# Altium PCB PCB2.PcbDoc
Units mm, origin at the board's own origin, x right, y up, seen from the top; angles counter-clockwise.
Board outline 150 x 65 mm, 2 copper layers (Top Layer, Bottom Layer); 20 components, 26 nets, 104 pads, 0 vias.
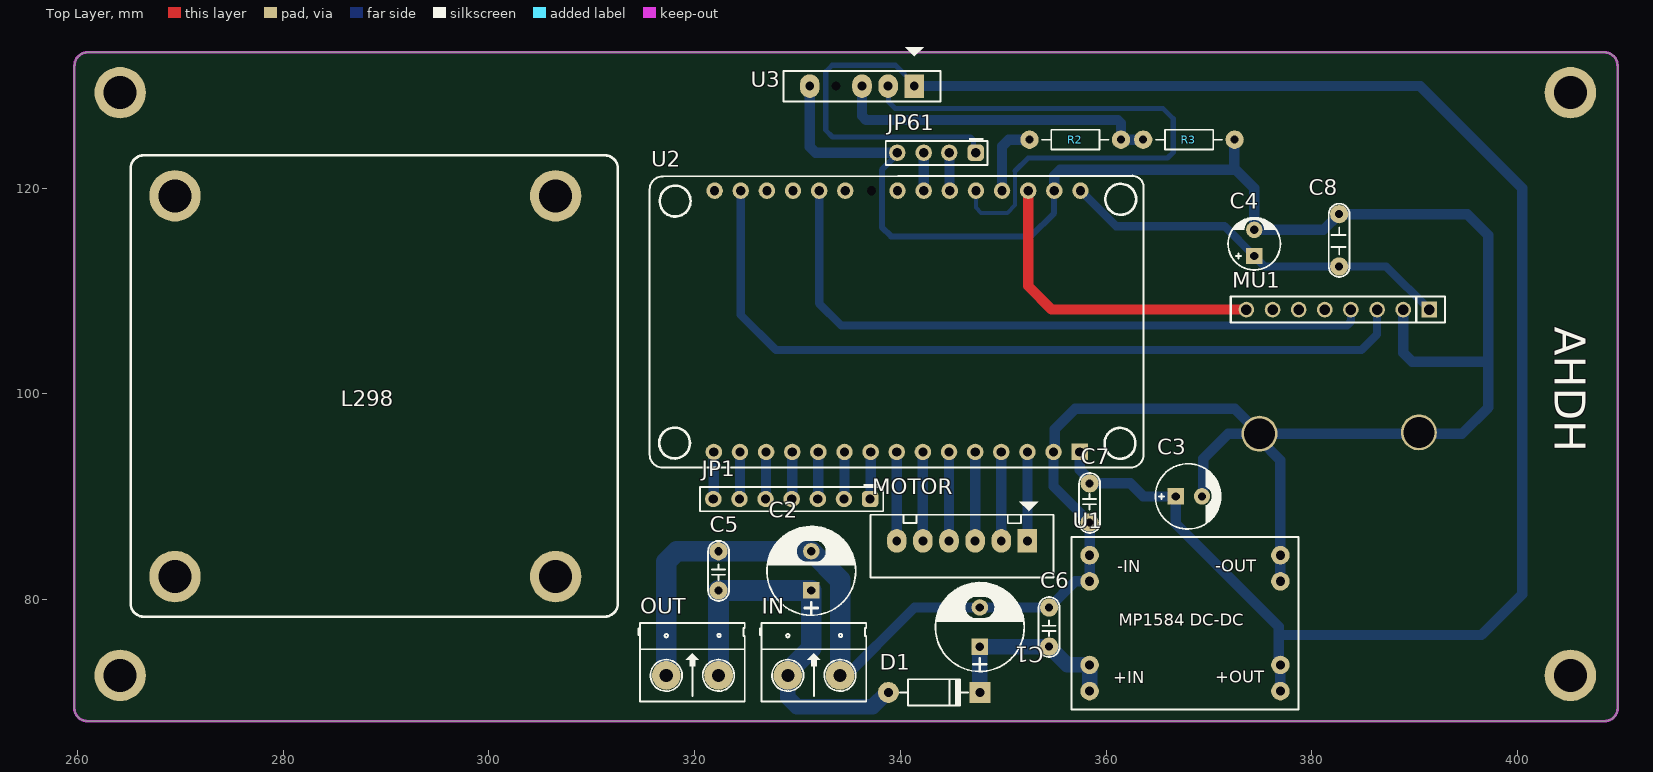
[diagram p0: Top Layer view]
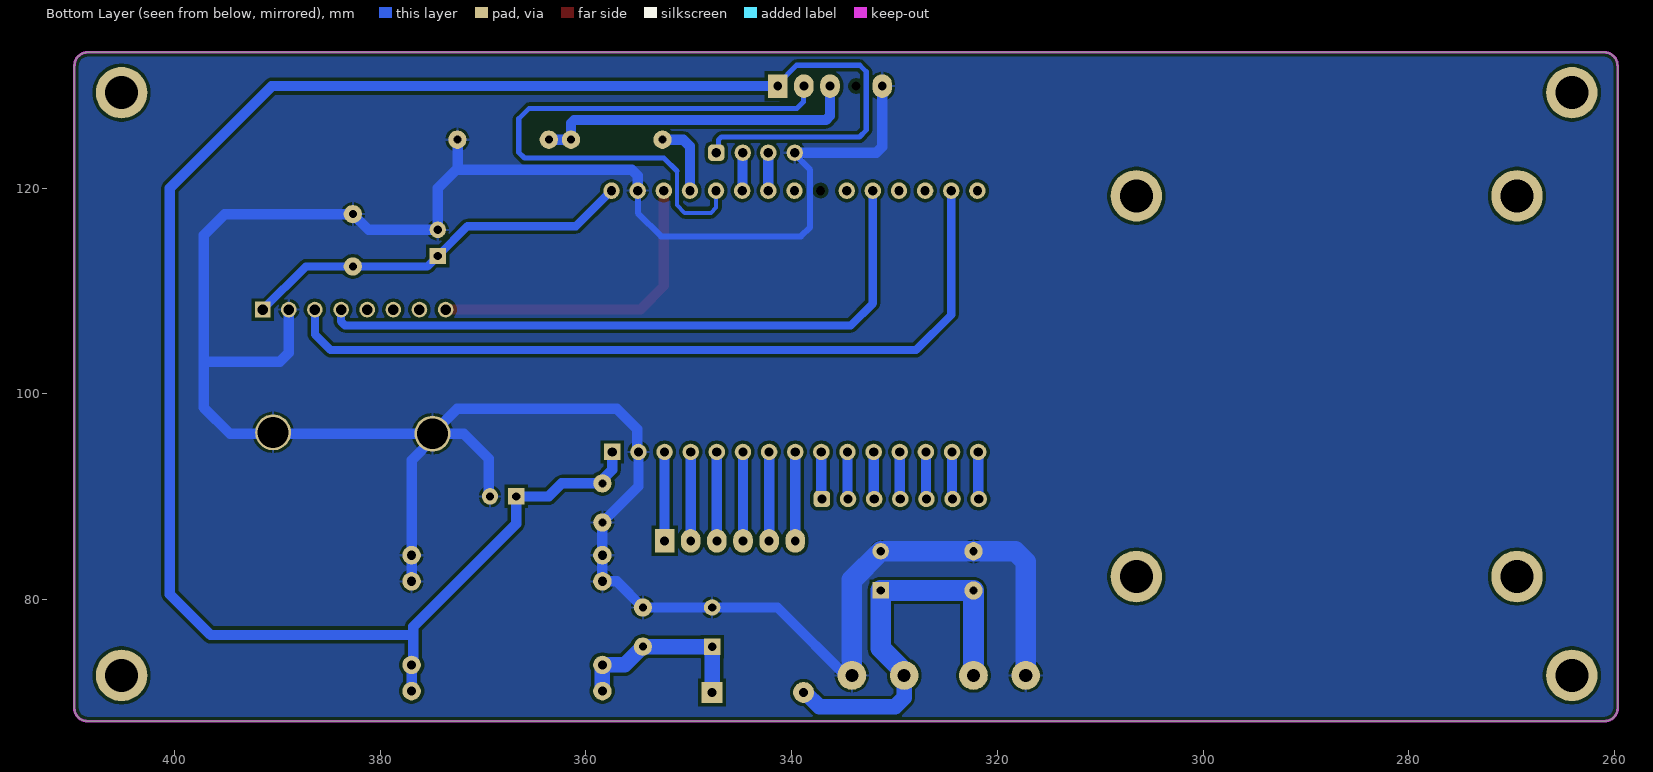
[diagram p1: Bottom Layer view, seen from below]
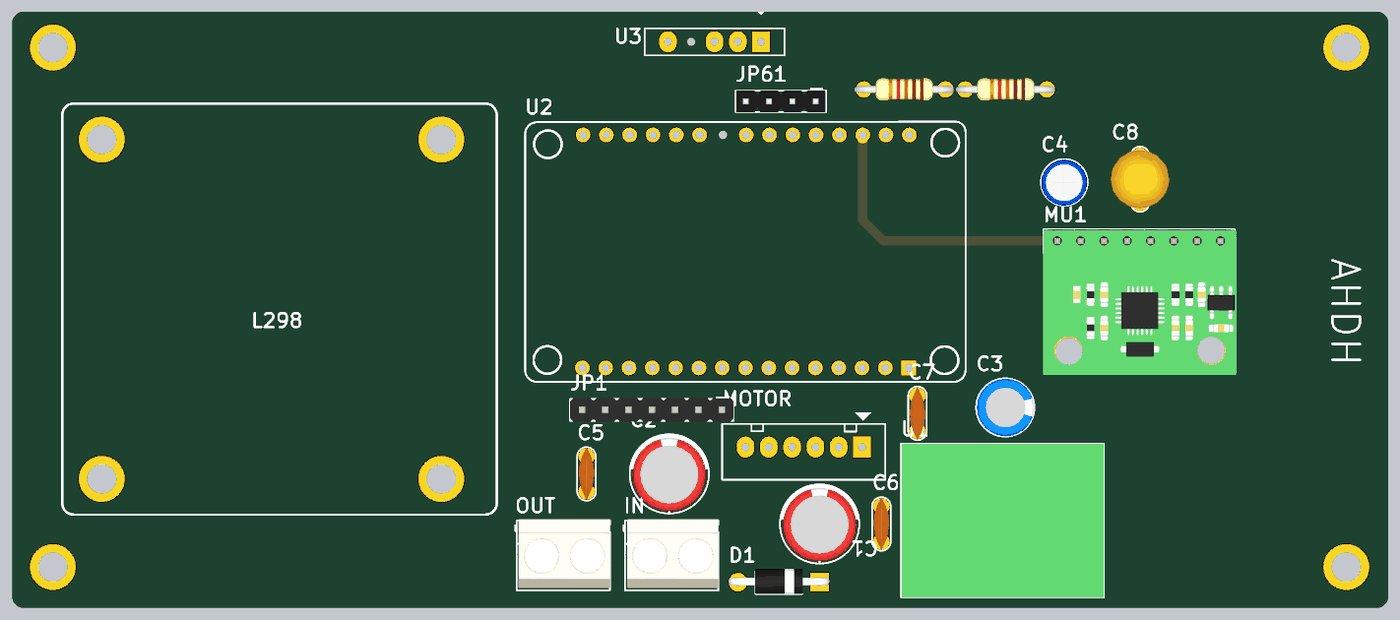
[diagram p2: 3D render of the assembled board from above, using the file's embedded part models]

## Layer stack, top to bottom
Top Solder: solder mask 0.0102, Solder Resist, Dk 3.5
Top Layer: signal copper 0.0356
Dielectric 1: dielectric 0.32, FR-4, Dk 4.8
Bottom Layer: signal copper 0.0356
Bottom Solder: solder mask 0.0102, Solder Resist, Dk 3.5

## Board outline
259.715,69.469 ccw(c260.985,69.469) 260.985,68.199 408.445,68.199 ccw(c408.445,69.469) 409.715,69.469 409.715,131.924 ccw(c408.438,131.924) 408.438,133.201 260.991,133.199 ccw(c260.991,131.932) 259.724,131.932 259.715,131.923

## Design rules (kind name [scope] priority, off if disabled: settings)
Clearance [All] p1: gap=0.25 ignorepadtopadclearanceinfootprint=FALSE
PolygonConnect [All] p1: connectstyle=Relief reliefconductorwidth=0.254 reliefentries=4 polygonreliefangle="90 Angle" airgapwidth=0.254
RoomDefinition Sheet2 [InComponentClass('Sheet2')] p1: confinementstyle=ConfineIn formatcopy=TRUE lockcomponents=FALSE outline 0,0 50.8,0 50.8,25.4 0,25.4
RoutingVias [All] p1: holewidth=0.711 width=1.27 viastyle="Through Hole" minholewidth=0.711 minwidth=1.27 maxholewidth=0.711 maxwidth=1.27
SolderMaskExpansion [All] p1: expansion=0.102 istentingtop=FALSE
Width [InNetClass('Signal')] p1: maxlimit=1 minlimit=0.4 preferedwidth=0.8
Width GND [InNet('GND')] p2: maxlimit=3 minlimit=0.5 preferedwidth=1
Width 3V [InNet('+3V')] p3: maxlimit=1.2 minlimit=0.5 preferedwidth=0.8
Width 5V [InNet('+5V')] p4: maxlimit=1.5 minlimit=0.5 preferedwidth=1
Width 12V [InNet('+12V')] p5: maxlimit=3 minlimit=1 preferedwidth=1.5
Width +V [InNet('+V')] p6: maxlimit=2 minlimit=1 preferedwidth=1.5
30 further rules are at their usual default settings.

## Components (designator, comment, footprint, x,y, rotation, side; value= is the part's Value field where it differs from the comment)
C1 "470uF/16V" CP1.5/3.4 347.726,75.438 r90 top value=100uF/35V/50V
C2 "1000uF/16V" CP1.5/3.4 331.343,80.899 r90 top
C3 "220uF" CP1/2.5 366.776,90.043 r0 top value="47uF/16 - 50V"
C4 "100uF" CP1/2 374.396,113.411 r90 top value=10uF/50V
C5 "104" CN1.5 322.326,82.677 r90 top value=0.1uF
C6 "104" CN1.5 354.457,77.216 r90 top value=0.1uF
C7 "104" CN1.5 358.394,89.535 r270 top value=0.1uF
C8 "104" CN2 382.651,112.395 r90 top value=0.1uF
D1 "Diode" D1A 338.836,70.993 r180 top value=1N5007
IN "Header 2" KF301-2P 329.057,72.644 r0 top
JP1 "JP7 PIN" JP7 337.058,89.789 r180 top value=JP7
JP61 "Jumper 4" JP4 344.78,123.444 r180 top value=J3
MOTOR "JP6 PIN" CON6 352.349,85.725 r180 top value=JP7
MU1 "MPU6050" MPU6050 385.826,100.711 r180 top
OUT "Header 2" KF301-2P 317.246,72.644 r0 top
R2 "1k" R1/4W 352.552,124.714 r0 top value="R1/4W - 1K"
R3 "2k" R1/4W 363.601,124.714 r0 top value="R1/4W - 1K"
U1 "Module MP1584 DC-DC" "MP1584 DC-DC" 358.394,84.328 r0 top
U2 "ESP32-BOARD30" ESP32-BOARD30-900 357.429,94.361 r90 top
U3 "HY-SRF05" SRF05 341.352,129.923 r180 top

## Footprints (in the part's own frame and the unit in brackets; to place one, negate y for a bottom-side part, rotate by r counter-clockwise, add the part's x,y. Pads: shape width x height; smd on the part's side, far side on the other; paste and mask are expansions set on the pad)
CN1.5 [mil]
  round 70 hole 31: 1(-70,0) 2(80,0)
  silkscreen extent -110,-40 120,40, body extent -110,-33 120,33, height 235
CN2 [mil]
  round 70 hole 31: 1(0,0) 2(200,0)
  silkscreen extent -40,-40 240,40, body extent -26,-125 226,126, height 423
CON6 [mil] "CON6"
  rect 75x90 hole 34: 1(0,0)
  oval 75x90 hole 34: 2(100,0) 3(200,0) 4(300,0) 5(400,0) 6(500,0)
  silkscreen extent -100,-150 600,140
CP1.5/3.4 [mm] "Tu hoa 220->470uF,16V, 470uF/16V,25V"
  rect 1.6x1.6 hole 0.8: 1(0,0)
  round 1.6 hole 0.8: 2(3.81,0)
  silkscreen extent -2.41,-4.32 6.22,4.32, body extent -2.16,-4 5.84,4, height 11.33
CP1/2 [mm] "Tu hoa < 22uF/16>50V"
  rect 1.6x1.6 hole 0.8: 1(0,0)
  round 1.6 hole 0.8: 2(2.54,0)
  silkscreen extent -1.35,-2.54 3.72,2.54, body extent -1.38,-2.51 3.67,2.54, height 7.53
CP1/2.5 [mm] "Tu hoa 33 >100 uF,50V, 220uF/16V,25V"
  rect 1.6x1.6 hole 0.8: 1(0,0)
  round 1.6 hole 0.8: 2(2.54,0)
  silkscreen extent -1.99,-3.17 4.36,3.17, body extent -1.93,-3.15 4.37,3.15, height 10.71
D1A [mil] "Diode 1A, W 100mil, L 350mil"
  round 80 hole 35: 1(0,0)
  rect 80x80 hole 35: 2(-350,0)
  silkscreen extent -305,-50 -45,50, body extent -393,-57 41,51, height 107
ESP32-BOARD30-900 [mm] "Footprint for ESP-32S-BOARD30-PIN, W=900mil"
  rect 1.6x1.6 hole 0.9: 1(0,0)
  round 1.6 hole 0.9: 2(0,2.54) 3(0,5.08) 4(0,7.62) 5(0,10.16) 6(0,12.7) 7(0,15.24) 8(0,17.78) 9(0,20.32) 10(0,22.86) 11(0,25.4) 12(0,27.94) 13(0,30.48) 14(0,33.02) 15(0,35.56) 16(25.4,35.484) 17(25.4,32.944) 18(25.4,30.404) 19(25.4,27.864) 20(25.4,25.324) 21(25.4,22.784) 23(25.4,17.704) 24(25.4,15.164) 25(25.4,12.624) 26(25.4,10.084) 27(25.4,7.544) 28(25.4,5.004) 29(25.4,2.464) 30(25.4,-0.076)
  round 0 hole 0.9: 22(25.4,20.244)
  silkscreen extent -1.52,-6.2 26.85,41.8
JP4 [mm] "Header 2.54MM 4P"
  rrect50% 1.6x1.6 hole 0.9: 1(-2.54,0)
  round 1.6 hole 0.9: 2(0.025,0) 3(2.515,0) 4(5.08,0)
  silkscreen extent -3.68,-1.45 6.2,1.19, body extent -3.58,-1.14 6.17,1.19, height 8.13
JP7 [mm] "Header 2.54MM 7P"
  rrect50% 1.6x1.6 hole 0.9: 1(0,0)
  round 1.6 hole 0.9: 2(2.54,0) 3(5.08,0) 4(7.62,0) 5(10.16,0) 6(12.7,0) 7(15.24,0)
  silkscreen extent -1.27,-1.45 16.54,1.19, body extent -1.27,-1.27 16.51,1.27, height 8.45
KF301-2P [mil] "Header 2, 2 pin, hight 300mil, Pin to Pin 200, Colour Green"
  round 110 hole 50: 1(0,0) 2(200,0)
  silkscreen extent -106,-100 300,200, body extent -92,-90 302,205, height 394
"MP1584 DC-DC" [mm] "Module MP1584 DC-DC, Vin 4.5-28V"
  round 1.8 hole 0.9: 1(0,-2.54) 1(0,0) 2(0,-13.208) 2(0,-10.668) 3(18.542,-13.208) 3(18.542,-10.668) 4(18.542,-2.54) 4(18.542,0)
  silkscreen extent -1.78,-14.99 20.32,1.78, body extent -1.73,-15.02 20.27,1.78, height 3.6
MPU6050 [mm]
  rect 1.52x1.52 hole 1.02: 1(-5.588,-7.493)
  round 3.5 hole 3: 2(-4.572,4.445) 2(10.922,4.572)
  round 1.52 hole 1.02: 2(-3.048,-7.493) 3(-0.508,-7.493) 4(2.032,-7.493) 5(4.572,-7.493) 6(7.112,-7.493) 7(9.652,-7.493) 8(12.192,-7.493)
  silkscreen extent -7.11,-8.76 13.71,-6.22, body extent -7.37,-8.76 13.74,7.11, height 14.54
R1/4W [mil] "R 1/4W, 2 Pin, 350mil"
  round 70 hole 31: 1(0,0) 2(350,0)
  silkscreen extent 48,-38 302,38, body extent -40,-47 386,47, height 111
SRF05 [mil] "CON5"
  rect 75x90 hole 34: 1(0,0)
  oval 75x90 hole 34: 2(100,0) 3(200,0) 5(400,0)
  round 0 hole 34: 4(300,0)
  silkscreen extent -100,-150 500,59

## Part data
C1: library part CP3, "Cap 100uF/35V - 470uF/16V", Description 1="1000uF/6,3V - 470uF/16V - 330uF - 25V", Description 2="220uF/35V - 100uF/50V - 63V - 4,7uF/200V", Description 3="22uF => 33uF100V - 3,3uF => 4,7uF/250V", Description 4="2,2uF =>3,3uF/350 - 2,2uF/400V - 1uF/450V"
C2: library part CP4, "Cap 1000uF/16V - 220uF/50V", Description 1="2200uF-3300uF/6,3V - 1000uF-2200uF/10V", Description 2="1000uF/16V - 470uF => 1000uF/25V - 100uF/100V", Description 3=330uF>470uF/35V_220uF>470uF/50V_10uF>22uF/250V, Description 4="220uF => 330uF/63V - 10uF =>33uF/160 - 200V", Description 5="4,7uF>10uF/250V_3,3uF>10uF/400V - 2,2uF>4,7uF/450V"
C3: library part CP2, "C 47uF/50V , 220uF/16V", Description 1="470uF/6,3V - 330uF/10V - 220uF/16V", Description 2="100uF/25V - 35V - 47uF/50V - 22uF/100V", Description 3="33uF => 47uF/63V - 1uF => 4,7uF/160V", Description 4="1uF => 2,2uF/250V - 1uF/350V"
C4: library part CP1, "Cap P  0,1uF < 22uF , 16 - 50V", Description 1="10 => 220uF/6,3V/10V - 10uF => 100uF/16V", Description 2="0,1uF => 33uF/50V - 10uF => 22uF/63V", Description 3="0,47uF => 10uF/100V"
C5 C6 C7 C8: library part CN2, "Cap np 104 => 105pF"
D1: "Default Diode", Code - JEDEC=DO-214-AB, Published=8-Jun-2000, Publisher="Altium Limited", Revision="July-2002: Re-released for DXP Platform."
IN OUT: library part Hed2, "Header 2 (Green)"
JP1: library part JP7
JP61: library part JP4
MOTOR: library part ISP6, "ISP6 PIN"
MU1: Manufacturer="W¨¹rth Elektronik eiSos GmbH", partNo=613004143121, ComponentLink1 Description=Manufacturer, ComponentLink1URL=http://www.we-online.com, ComponentLink2 Description=Datasheet, ComponentLink2URL=http://katalog.we-online.de/em/datasheet/6130xx143121.pdf, Created by="Karrer Zheng", Created Date="29 March 2013", NoPins=04
R2 R3: library part R1/4W, "Resistor 1/4W"
U1: library part "MP1584 DC-DC"

## Free pads (board coordinates)
  round 5 hole 3.2: 1(264.16,72.644) 1(264.16,129.286) 1(269.494,82.253) 1(269.494,119.253) 1(306.494,82.253) 1(306.494,119.253) 1(405.13,72.644) 1(405.13,129.286)

## Nets (pads, with @x,y where several pads share a name; then routed paths per layer and width w, separated by ;. In a path a pad name is that pad's centre, name@x,y a point inside that pad or via, vN(x,y) a via of type N, cw(c..) or ccw(c..) an arc to the next point about the centre after c; other vN are vias at no path point)
+3V: C4.1 C8.1 MU1.1 U2.30 | length 38.7
  Bottom Layer w0.8: U2.30 360.959,116.307 371.5,116.307 C4.1 375.412,112.395 C8.1 387.223,112.395 MU1.1
+5V: C3.1 C7.1 JP61.1 U1.3 U2.1 U3.1 | length 195.1
  Bottom Layer w0.5: U3.1@341.352,130.113 339.513,131.953 333.375,131.953 332.74,131.318 332.74,125.642 333.414,124.968 346.831,124.968 347.124,124.675 347.124,123.639 JP61.1 ; C7.1 C7.1@358.394,91.659
  Bottom Layer w1: U3.1@341.352,130.113 U3.1 390.523,129.923 400.431,120.015 400.431,80.518 396.494,76.581 376.91,76.581 376.783,76.708 ; U2.1 357.429,92.624 C7.1@358.394,91.659 ; C7.1 362.331,91.313 363.601,90.043 C3.1 366.776,87.376 376.783,77.369 376.783,76.708 ; U1.3@376.936,71.12 376.936,73.66 376.783,73.813 376.783,76.708
+12V: C2.1 C5.1 D1.1 IN.1 OUT.2 | length 39.4
  Bottom Layer w1.5: IN.1@329.057,72.994 329.057,70.475 329.936,69.596 337.295,69.596 338.692,70.993 D1.1
  Bottom Layer w2: OUT.2 C5.1 C2.1 331.343,75.28 IN.1@329.057,72.994
+V: C1.1 C6.1 D1.2 U1.2 | length 18.4
  Bottom Layer w1.5: D1.2 C1.1 C6.1 356.235,73.66 358.394,73.66 U1.2@358.394,71.12
GND: C1.2 C2.2 C3.2 C4.2 C5.2 C6.2 C7.2 C8.2 IN.2 JP61.4 MU1.2 OUT.1 R3.2 U1.1 U1.4 U2.2 U2.29 U3.5 | length 278.9
  Top Layer w1: C3.2@369.316,89.993 C3.2
  Bottom Layer w0.5: U2.29@354.939,119.735 U2.29
  Bottom Layer w0.6: JP61.4@339.7,123.282 338.201,121.783 338.201,116.205 339.09,115.316 352.679,115.316 354.939,117.576 U2.29@354.939,119.735
  Bottom Layer w1: U3.5 331.192,124.03 331.778,123.444 JP61.4 JP61.4@339.7,123.282 ; IN.2@334.137,72.009 341.376,79.248 C1.2 C6.2 356.997,81.788 358.394,81.788 358.394,84.328 C7.2 354.889,91.008 U2.2 355.004,94.476 355.004,96.559 356.997,98.552 372.491,98.552 MU1.2@374.904,96.139 ; U2.29 354.965,121.207 355.551,121.793 372.286,121.793 ; C3.2 369.431,90.158 369.431,93.714 371.856,96.139 MU1.2@374.904,96.139 ; R3.2 372.452,124.675 372.452,121.959 374.396,120.015 C4.2 381.127,115.951 C8.2 395.097,117.475 397.129,115.443 397.129,103.124 ; U1.4@376.936,81.788 376.936,84.328 376.936,93.575 374.904,95.607 MU1.2@374.904,96.139 ; MU1.2@388.874,108.204 388.874,104.013 389.763,103.124 397.129,103.124 ; MU1.2@374.904,96.139 394.589,96.139 397.129,98.679 397.129,103.124
  Bottom Layer w2: OUT.1 317.246,83.693 318.262,84.709 C5.2 C2.2 334.137,81.915 IN.2
NetJP1_1: JP1.1 U2.9 | length 4.6
  Bottom Layer w1: JP1.1@337.109,89.789 U2.9
NetJP1_2: JP1.2 U2.10 | length 4.6
  Bottom Layer w1: JP1.2@334.569,89.789 U2.10
NetJP1_3: JP1.3 U2.11 | length 4.6
  Bottom Layer w1: JP1.3@332.029,89.789 U2.11
NetJP1_4: JP1.4 U2.12 | length 4.6
  Bottom Layer w1: JP1.4@329.489,89.789 U2.12
NetJP1_5: JP1.5 U2.13 | length 4.6
  Bottom Layer w1: JP1.5@326.949,89.789 U2.13
NetJP1_6: JP1.6 U2.14 | length 4.6
  Bottom Layer w1: JP1.6@324.409,89.789 U2.14
NetJP1_7: JP1.7 U2.15 | length 4.6
  Bottom Layer w1: JP1.7@321.869,89.789 U2.15
NetMOTOR_1: MOTOR.1 U2.3 | length 8.6
  Bottom Layer w1: MOTOR.1 U2.3
NetMOTOR_2: MOTOR.2 U2.4 | length 8.6
  Bottom Layer w1: MOTOR.2 U2.4
NetMOTOR_3: MOTOR.3 U2.5 | length 8.6
  Bottom Layer w1: MOTOR.3 U2.5
NetMOTOR_4: MOTOR.4 U2.6 | length 8.6
  Bottom Layer w1: MOTOR.4 U2.6
NetMOTOR_5: MOTOR.5 U2.7 | length 8.6
  Bottom Layer w1: MOTOR.5 U2.7
NetMOTOR_6: MOTOR.6 U2.8 | length 8.6
  Bottom Layer w1: MOTOR.6 U2.8
NetMU1_3: MU1.3 U2.17 | length 78.4
  Bottom Layer w0.8: U2.17 324.485,107.696 327.914,104.267 384.81,104.267 386.334,105.791 MU1.3
NetMU1_4: MU1.4 U2.20 | length 64.8
  Bottom Layer w0.8: U2.20 332.105,108.814 334.252,106.667 383.401,106.667 383.794,107.06 MU1.4
NetMU1_8: MU1.8 U2.28 | length 31.4
  Top Layer w1: U2.28 352.425,110.49 354.711,108.204 MU1.8
NetR2_1: R2.1 U2.27 | length 7.2
  Bottom Layer w1: U2.27 349.885,124.079 350.52,124.714 R2.1
NetR2_2: R2.2 R3.1 U3.3 | length 32.1
  Bottom Layer w1: U3.3 336.272,127.024 336.677,126.619 361.149,126.619 361.442,126.326 R2.2 R3.1
NetU2_26: U2.26 U3.2 | length 58.6
  Bottom Layer w0.4: U2.26 347.345,118.11 347.853,117.602 350.393,117.602 351.155,118.364 351.155,121.666
  Bottom Layer w0.5: U3.2 338.86,129.875 338.86,128.373 339.471,127.762 365.506,127.762 366.522,126.746 366.522,123.483 365.975,122.936 352.425,122.936 351.155,121.666
RX2: JP61.2 U2.25 | length 3.7
  Bottom Layer w1: JP61.2 344.78,123.419 344.78,119.786 U2.25
TX2: JP61.3 U2.24 | length 3.7
  Bottom Layer w1: U2.24 JP61.3
pads on no net: MU1.5 MU1.6 MU1.7 U2.16 U2.18 U2.19 U2.21 U2.22 U2.23 U3.4

## Polygon pours and split planes (outlines as drawn)
GND on Bottom Layer "GND_L02_P000" (solid, remove dead copper, pour order 0): 259.715,133.223 409.702,133.223 409.702,68.199 259.715,68.199

## Keep-outs
Keep-Out Layer:
  lines w0.254: 259.715,131.923 259.715,69.469 ccw(c260.985,69.469) 260.985,68.199 408.445,68.199 ccw(c408.445,69.469) 409.715,69.469 409.715,131.924 ; 259.724,131.932 cw(c260.994,131.932) 260.994,133.202 ; 260.991,133.199 408.44,133.199 ; 408.438,133.201 cw(c408.438,131.931) 409.708,131.931

## Silkscreen, mask and mechanical layers (free items; w line width, h text height)
Top Overlay:
  lines w0.254: 265.176,79.629 ccw(c266.446,79.629) 266.446,78.359 311.277,78.359 ccw(c311.277,79.629) 312.547,79.629 312.547,121.92 ccw(c311.277,121.92) 311.277,123.19 266.446,123.19 ccw(c266.446,121.92) 265.176,121.92 265.176,79.629
  text "AHDH" at 403.606,106.553 h3 r270
  text "L298" at 285.623,98.806 h1.52

## Text inside footprints (layer, text, board x,y; h text height)
U1: Top Overlay "MP1584 DC-DC" at 361.203,77.074 h2.03; Top Overlay "-IN" at 361.094,82.296 h2.03; Top Overlay "+IN" at 360.68,71.501 h2.03; Top Overlay "+OUT" at 370.586,71.524 h2.03; Top Overlay "-OUT" at 370.586,82.319 h2.03